# EAGLE board PowerSupply (EAGLE 5.07)
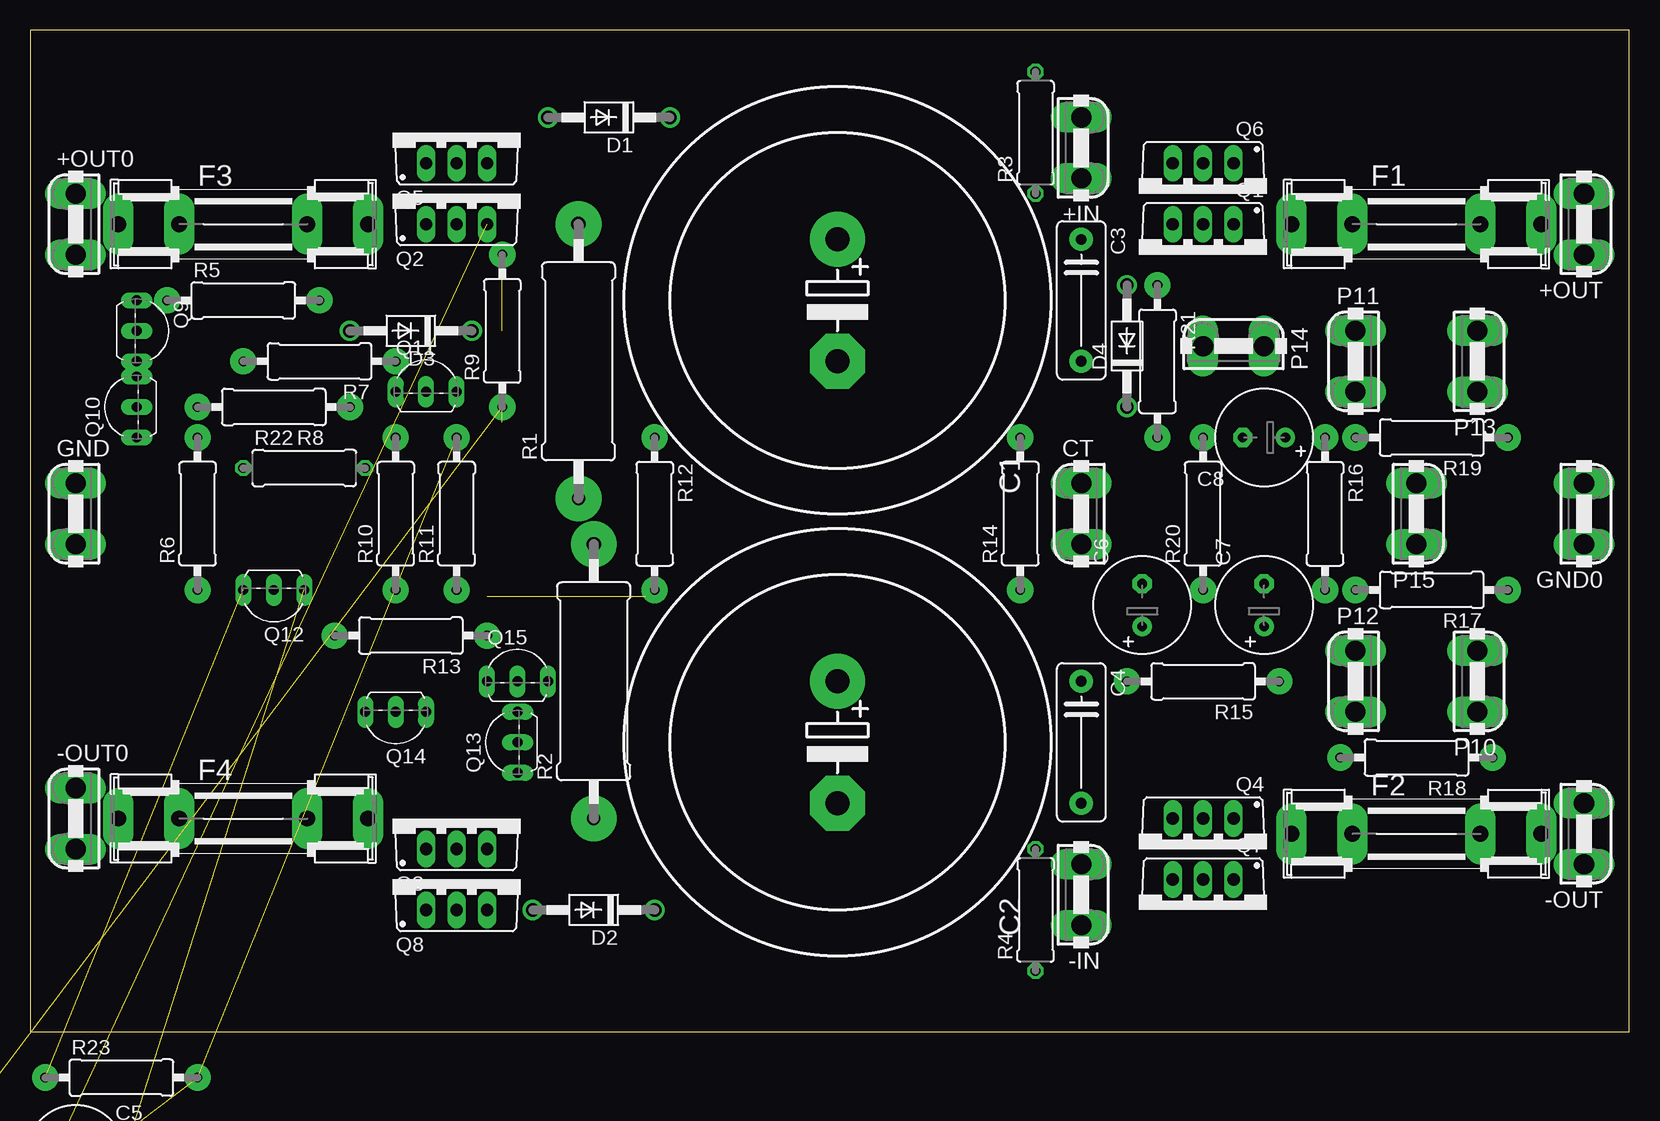
[diagram p0: board, top side]
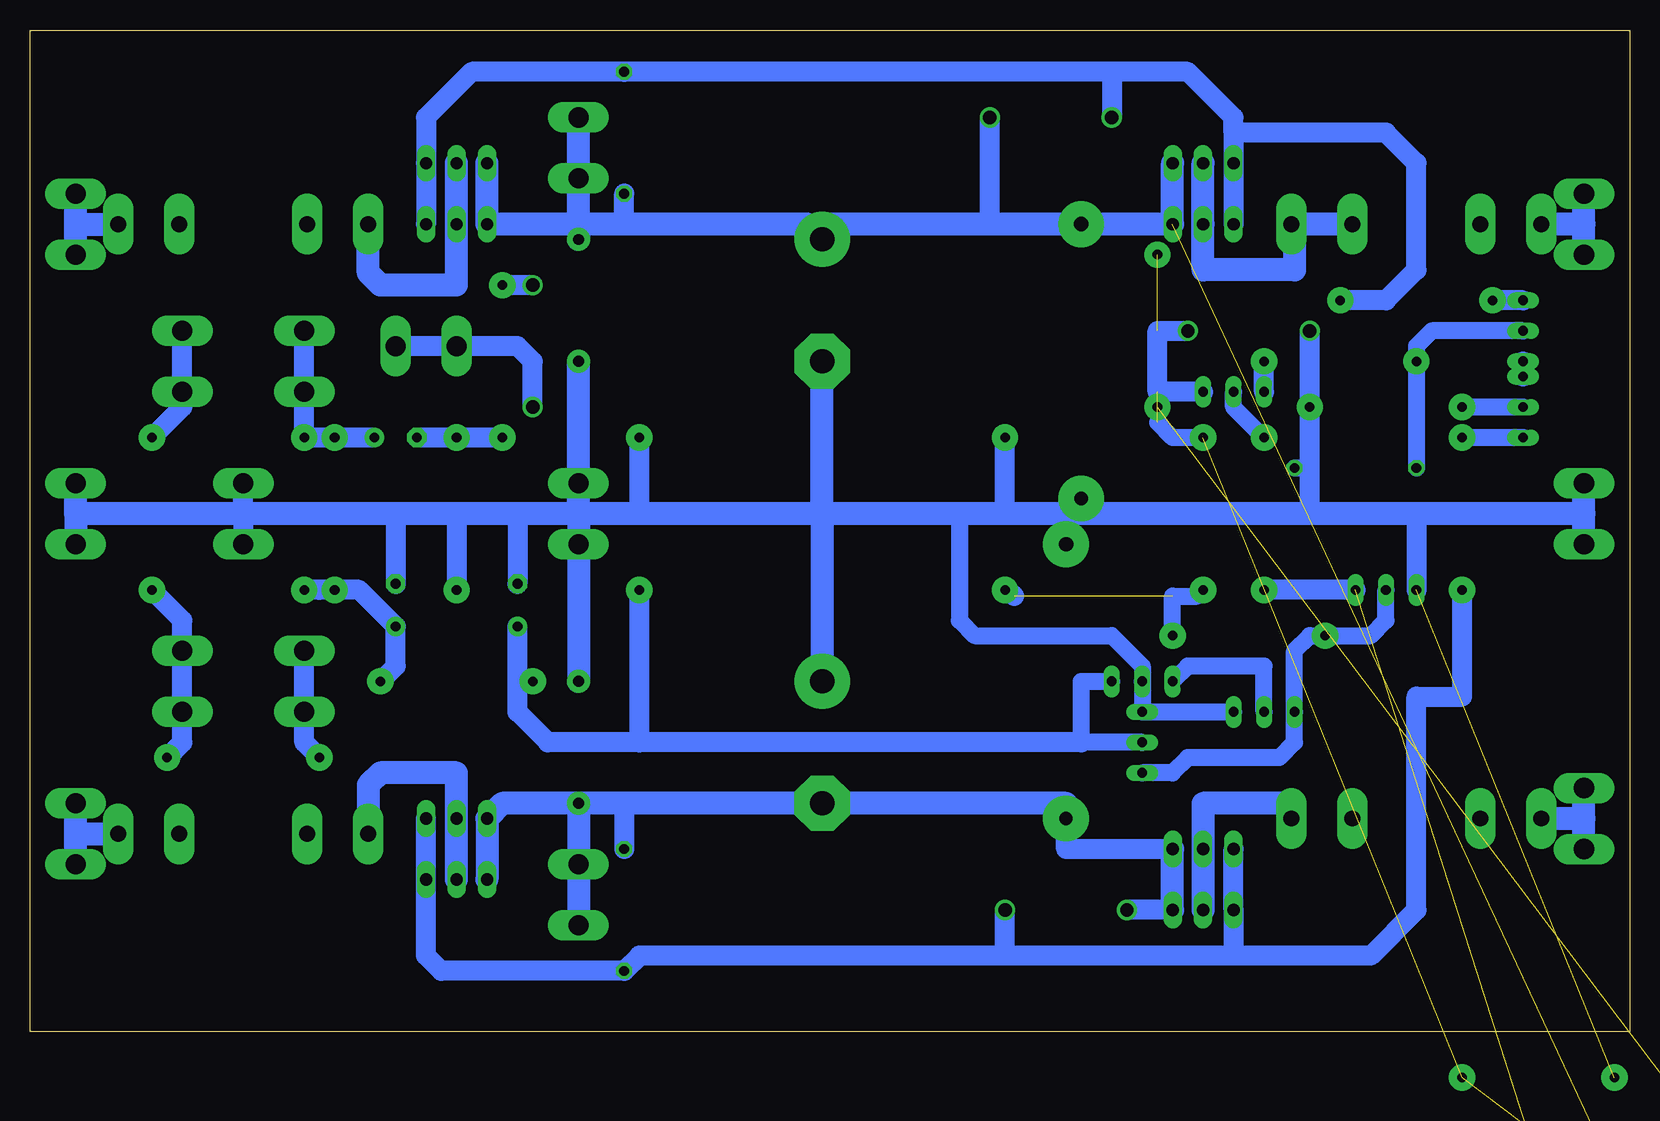
[diagram p1: board, bottom side, seen from below]

Size 133.33 x 83.49 mm. Coordinates in mm from the lower left corner, seen from the top.
Outline: 0,0 133.33,0 133.33,83.49 0,83.49 0,0
Copper layers (1*16): Top 0.035mm / dielectric 1.5mm / Bottom 0.035mm
Design rules "default": minimum track width 10mil, minimum drill 24mil, track to track 8mil, track to pad 8mil, pad to pad 8mil, via to via 8mil, smd to smd 8mil, copper to edge 40mil, drill to drill 8mil, minimum pad ring 10mil, minimum via ring 8mil, stop-mask expansion 4mil, vias tented up to drill 0mil, thermal gap 10mil

## Footprints (pad centres in the part's own frame; a part is rotated, then mirrored left to right if it is on the bottom)
FASTON = drill 1.676 pad 2.54 long: 1 -2.54,0; 2 2.54,0
EB35D = drill 2.007 pad 4.597 round: + -5.08,0 | drill 2.007 pad 4.597 octagon: - 5.08,0
C102-043X133 = drill 0.9 pad 1.93 round: 1 -5.08,0; 2 5.08,0
E3,5-8 = drill 0.813 pad 1.6 round: + -1.778,0 | drill 0.813 pad 1.6 octagon: - 1.778,0
DO41-10 = drill 1.118 round: A 5.08,0; C -5.08,0
SHK20L = drill 1.321 pad 2.54 long: 1A -10.414,0; 1B -5.334,0; 2A 10.414,0; 2B 5.334,0
TO220BV = drill 1.016 long: D 0,-2.54; G -2.54,-2.54; S 2.54,-2.54
TO92-EBC = drill 0.813 long: B 0,-1.27; C -2.54,-1.27; E 2.54,-1.27
0617/22 = drill 1.1 pad 3.81 round: 1 -11.43,0 | drill 1.2 pad 3.81 round: 2 11.43,0
0309/10 = drill 0.813 octagon: 1 -5.08,0; 2 5.08,0
0309/12 = drill 0.8 pad 2.184 round: 1 -6.35,0; 2 6.35,0

## Placement (x,y rotation side)
+IN  +  [FASTON]  87.63,73.66 90 top
+OUT  +  [FASTON]  129.54,67.31 90 top
+OUT0  +  [FASTON]  3.81,67.31 270 top
-IN  -  [FASTON]  87.63,11.43 90 top
-OUT  +  [FASTON]  129.54,16.51 90 top
-OUT0  +  [FASTON]  3.81,17.78 270 top
C1  10000uF  [EB35D]  67.31,60.96 270 top
C2  10000uF  [EB35D]  67.31,24.13 270 top
C3  .1  [C102-043X133]  87.63,60.96 270 top
C4  .1  [C102-043X133]  87.63,24.13 270 top
C5  100uF  [E3,5-8]  3.81,-10.16 0 top  (outside the outline)
C6  22uF  [E3,5-8]  92.71,35.56 90 top
C7  22uF  [E3,5-8]  102.87,35.56 90 top
C8  1uF  [E3,5-8]  102.87,49.53 180 top
CT  GND  [FASTON]  87.63,43.18 270 top
D1  12V  [DO41-10]  48.26,76.2 180 top
D2  12V  [DO41-10]  46.99,10.16 180 top
D3  12V  [DO41-10]  31.75,58.42 180 top
D4  1N4001  [DO41-10]  91.44,57.15 90 top
F1  3A  [SHK20L]  115.57,67.31 0 top
F2  3A  [SHK20L]  115.57,16.51 0 top
F3  3A  [SHK20L]  17.78,67.31 0 top
F4  3A  [SHK20L]  17.78,17.78 0 top
GND  +  [FASTON]  3.81,43.18 270 top
GND0  GND  [FASTON]  129.54,43.18 90 top
P10  +  [FASTON]  120.65,29.21 90 top
P11  +  [FASTON]  110.49,55.88 270 top
P12  +  [FASTON]  110.49,29.21 270 top
P13  +  [FASTON]  120.65,55.88 90 top
P14  +  [FASTON]  100.33,57.15 180 top
P15  +  [FASTON]  115.57,43.18 90 top
Q1  FQPF15P12  [TO220BV]  97.79,64.77 180 top
Q2  FQPF15P12  [TO220BV]  35.56,69.85 0 top
Q3  FQPF45N15V2  [TO220BV]  35.56,17.78 0 top
Q4  FQPF45N15V2  [TO220BV]  97.79,15.24 180 top
Q5  FQPF15P12  [TO220BV]  35.56,74.93 0 top
Q6  FQPF15P12  [TO220BV]  97.79,69.85 180 top
Q7  FQPF45N15V2  [TO220BV]  97.79,10.16 180 top
Q8  FQPF45N15V2  [TO220BV]  35.56,12.7 0 top
Q9  BC546  [TO92-EBC]  10.16,58.42 270 top
Q10  BC556  [TO92-EBC]  7.62,52.07 90 top
Q11  BC556  [TO92-EBC]  33.02,54.61 0 top
Q12  BC546  [TO92-EBC]  20.32,35.56 180 top
Q13  BC546  [TO92-EBC]  39.37,24.13 90 top
Q14  BC556  [TO92-EBC]  30.48,25.4 180 top
Q15  BC546  [TO92-EBC]  40.64,30.48 0 top
Q16  BC556  [TO92-EBC]  -5.08,-8.89 0 top  (outside the outline)
R1  4K7  [0617/22]  45.72,55.88 90 top
R2  4K7  [0617/22]  46.99,29.21 90 top
R3  33K  [0309/10]  83.82,74.93 90 top
R4  33K  [0309/10]  83.82,10.16 90 top
R5  4K7  [0309/12]  17.78,60.96 0 top
R6  4K7  [0309/12]  13.97,43.18 90 top
R7  4K7  [0309/12]  24.13,55.88 180 top
R8  4K7  [0309/12]  20.32,52.07 180 top
R9  4K7  [0309/12]  39.37,58.42 90 top
R10  3K3  [0309/12]  30.48,43.18 90 top
R11  150K  [0309/12]  35.56,43.18 90 top
R12  56K  [0309/12]  52.07,43.18 270 top
R13  56K  [0309/12]  31.75,33.02 180 top
R14  33K  [0309/12]  82.55,43.18 90 top
R15  33K  [0309/12]  97.79,29.21 180 top
R16  33K  [0309/12]  107.95,43.18 270 top
R17  33K  [0309/12]  116.84,36.83 180 top
R18  0R  [0309/12]  115.57,22.86 180 top
R19  0R  [0309/12]  116.84,49.53 180 top
R20  15K  [0309/12]  97.79,43.18 90 top
R21  18K  [0309/12]  93.98,55.88 270 top
R22  OPEN  [0309/10]  22.86,46.99 0 top
R23  4K7  [0309/12]  7.62,-3.81 0 top  (outside the outline)
R24  3K3  [0309/12]  -1.27,-19.05 0 top  (outside the outline)

## Library data of the parts
+IN +OUT +OUT0 -IN -OUT -OUT0 CT GND GND0 P10-P15 = keystone
C1-C8 R1-R24 = resistor
D1-D4 = diode
F1-F4 = fuse
Q1-Q8 = transistor-power
Q9 Q12 Q13 Q15 = transistor-npn
Q10 Q11 Q14 Q16 = transistor-pnp

## Nets
0V: C1.- C2.+ C3.2 C4.1 C6.- C7.- CT.1 CT.2 D3.A GND0.1 GND0.2 GND.1 GND.2 P15.1 P15.2 Q12.E Q13.E Q14.C Q15.B R1.1 R2.2 R8.1 R12.1 R14.2 R20.1 R22.2 R23.1
+IN: +IN.1 +IN.2 C1.+ C3.1 C5.+ D1.C Q1.S Q2.S Q5.S Q6.S Q16.E R1.2 R3.1
N$1: D1.A Q1.G Q2.G Q5.G Q6.G R3.2 R5.2
N$2: D2.C Q3.G Q4.G Q7.G Q8.G R4.1 R6.1
N$3: F1.1A Q1.D Q6.D
N$4: P10.1 P10.2 R17.1 R18.1
N$5: -IN.1 -IN.2 C2.- C4.2 D2.A Q3.S Q4.S Q7.S Q8.S R2.1 R4.2
N$6: F3.2A Q2.D Q5.D
N$7: Q16.C R9.1
N$8: F2.1A Q4.D Q7.D
N$9: F4.2A Q3.D Q8.D
N$10: +OUT0.1 +OUT0.2 F3.1A
N$11: -OUT0.1 -OUT0.2 F4.1A
N$12: +OUT.1 +OUT.2 F1.2A
N$13: -OUT.1 -OUT.2 F2.2A
N$14: Q9.C R5.1
N$15: Q10.C R6.2
N$16: Q9.E Q10.E
N$17: Q9.B R7.2 R22.1
N$18: Q10.B R8.2
N$19: Q11.C R7.1
N$20: C5.- D3.C Q11.E R9.2 R11.2 R23.2
N$21: Q11.B R10.2
N$22: Q12.C R10.1 R24.2
N$23: R11.1 R12.2 R13.1
N$24: Q12.B Q13.C Q14.E R13.2
N$25: Q14.B Q15.C
N$26: C8.+ P11.1 P11.2 R16.1 R19.2
N$27: C7.+ R15.1 R16.2 R17.2
N$28: C6.+ Q13.B Q15.E R14.1 R15.2
N$29: P12.1 P12.2 R18.2
N$30: P13.1 P13.2 R19.1
N$31: C8.- R20.2 R21.2
N$32: D4.A R21.1
N$33: D4.C P14.1 P14.2
N$34: Q16.B R24.1

## Tracks (layer width: path | path; a pad name or v marks a point on that pad's centre or on a via)
0V  (1 unrouted)
  Bottom 1.422: 55.88,43.18 55.88,34.29 54.61,33.02 43.18,33.02 40.64,30.48 Q15.B Q13.E Q14.C | 26.67,46.99 R22.2
  Bottom 1.676: 26.67,43.18 26.67,46.99 R8.1 D3.A | 17.78,43.18 Q12.E | 52.07,43.18 R12.1 | 92.71,43.18 C6.- | 102.87,43.18 C7.- | P15.2 115.57,43.18 P15.1 | 97.79,43.18 R20.1 | 82.55,43.18 R14.2
  Bottom 1.93: 67.31,43.18 C2.+ | 67.31,43.18 C1.- | 46.99,43.18 R1.1 | 46.99,43.18 R2.2 | 46.99,43.18 52.07,43.18 55.88,43.18 67.31,43.18 | C3.2 CT.1 87.63,43.18 | C4.1 CT.2 87.63,43.18 | 67.31,43.18 82.55,43.18 87.63,43.18 | GND.2 3.81,43.18 | 3.81,43.18 GND.1 | 3.81,43.18 17.78,43.18 26.67,43.18 40.64,43.18 46.99,43.18 | 129.54,43.18 GND0.1 | 129.54,43.18 GND0.2 | 87.63,43.18 92.71,43.18 97.79,43.18 102.87,43.18 115.57,43.18 129.54,43.18
+IN  (2 unrouted)
  Bottom 1.676: 83.82,67.31 R3.1 | 53.34,67.31 D1.C
  Bottom 1.93: 87.63,67.31 83.82,67.31 68.58,67.31 C1.+ 67.31,67.31 53.34,67.31 R1.2 39.37,67.31 Q2.S Q5.S | +IN.2 +IN.1 87.63,67.31 | 87.63,67.31 C3.1 | 87.63,67.31 Q1.S Q6.S
N$1
  Bottom 1.676: 43.18,80.01 36.83,80.01 33.02,76.2 33.02,74.93 | 43.18,80.01 R3.2 96.52,80.01 100.33,76.2 Q6.G Q1.G | Q2.G Q5.G 33.02,74.93 | R5.2 20.32,60.96 17.78,63.5 17.78,72.39 20.32,74.93 33.02,74.93 | 43.18,80.01 D1.A
N$2
  Bottom 1.676: R6.1 13.97,27.94 17.78,27.94 17.78,10.16 21.59,6.35 33.02,6.35 | 33.02,6.35 52.07,6.35 | 52.07,6.35 82.55,6.35 R4.1 99.06,5.08 100.33,6.35 Q7.G Q4.G | 52.07,6.35 D2.C | Q3.G Q8.G 33.02,6.35
N$3
  Bottom 1.93: Q6.D Q1.D 97.79,62.23 104.14,62.23 105.16,63.25 F1.1A
N$4
  Bottom 1.676: R17.1 120.65,34.29 P10.2 P10.1 120.65,24.13 R18.1
N$5
  Bottom 1.676: Q3.S 46.99,15.24 R2.1 | 83.82,19.05 R4.2 | Q8.S D2.A
  Bottom 1.93: R2.1 46.99,19.05 C2.- 83.82,19.05 C4.2 | -IN.1 -IN.2 C4.2 | Q8.S Q3.S | Q7.S Q4.S 93.98,19.05 C4.2
N$6
  Bottom 1.93: Q5.D Q2.D 35.56,63.5 27.94,63.5 27.94,67.31 | 27.94,67.31 F3.2A | 22.86,67.31 27.94,67.31
N$7  (1 unrouted)
N$8
  Bottom 1.93: Q7.D Q4.D 97.79,21.59 104.14,21.59 105.16,20.57 F2.1A
N$9
  Bottom 1.93: Q8.D Q3.D 35.56,19.05 27.94,19.05 27.94,18.03 F4.2A
N$10
  Bottom 1.93: +OUT0.2 3.81,67.31 | 3.81,67.31 +OUT0.1 | 3.81,67.31 F3.1A
N$11
  Bottom 1.93: -OUT0.2 3.81,17.78 | 3.81,17.78 -OUT0.1 | 3.81,17.78 F4.1A
N$12
  Bottom 1.93: 129.54,67.31 F1.2A | 129.54,67.31 +OUT.2 | +OUT.1 129.54,67.31
N$13
  Bottom 1.93: 129.54,16.51 F2.2A | 129.54,16.51 -OUT.2 | -OUT.1 129.54,16.51
N$14
  Bottom 1.676: Q9.C R5.1
N$15
  Bottom 1.422: Q10.C R6.2
N$16
  Bottom 1.676: Q10.E Q9.E
N$17
  Bottom 1.422: Q9.B 16.51,58.42 17.78,57.15 R7.2 R22.1
N$18
  Bottom 1.422: Q10.B R8.2
N$19
  Bottom 1.676: Q11.C R7.1
N$20  (4 unrouted)
  Bottom 1.422: R11.2 38.1,49.53 39.37,50.8
  Bottom 1.676: D3.C 39.37,58.42 39.37,53.34 Q11.E
N$21
  Bottom 1.422: R10.2 33.02,52.07 Q11.B
N$22  (1 unrouted)
  Bottom 1.676: Q12.C R10.1
N$23  (1 unrouted)
  Bottom 1.422: R11.1 36.07,36.32 38.1,36.32 R13.1
  Bottom 1.676: 51.31,36.32 R12.2
N$24
  Bottom 1.422: Q12.B 20.32,34.29 21.59,33.02 R13.2 26.67,33.02 27.94,31.75 Q14.E 27.94,24.13 29.21,22.86 36.83,22.86 38.1,21.59 Q13.C
N$25
  Bottom 1.422: Q15.C 36.83,30.48 30.48,30.48 Q14.B
N$26
  Bottom 1.676: P11.1 P11.2 R19.2 R16.1 C8.+
N$27
  Bottom 1.676: R15.1 102.87,30.48 C7.+ 105.92,36.83 R16.2 109.22,36.83 R17.2
N$28
  Bottom 1.422: Q13.B 45.72,24.13 45.72,29.21 Q15.E
  Bottom 1.676: 92.71,29.21 92.71,26.67 90.17,24.13 82.55,24.13 | 92.71,29.21 C6.+ | 45.72,24.13 82.55,24.13 | 92.71,29.21 R15.2 | 82.55,24.13 R14.1
N$29
  Bottom 1.676: R18.2 110.49,24.13 P12.2 P12.1
N$30
  Bottom 1.676: R19.1 120.65,52.07 P13.1 P13.2
N$31
  Bottom 1.676: R21.2 R20.2 C8.-
N$32
  Bottom 1.676: D4.A R21.1
N$33
  Bottom 1.676: D4.C 91.44,55.88 92.71,57.15 P14.2 P14.1
N$34  (1 unrouted)